# Altium PCB Mic.PcbDoc
Units mm, origin at the board's own origin, x right, y up, seen from the top; angles counter-clockwise.
Board outline 40.88 x 23.94 mm, 2 copper layers (Top Layer, Bottom Layer); 17 components, 12 nets, 38 pads, 52 vias.
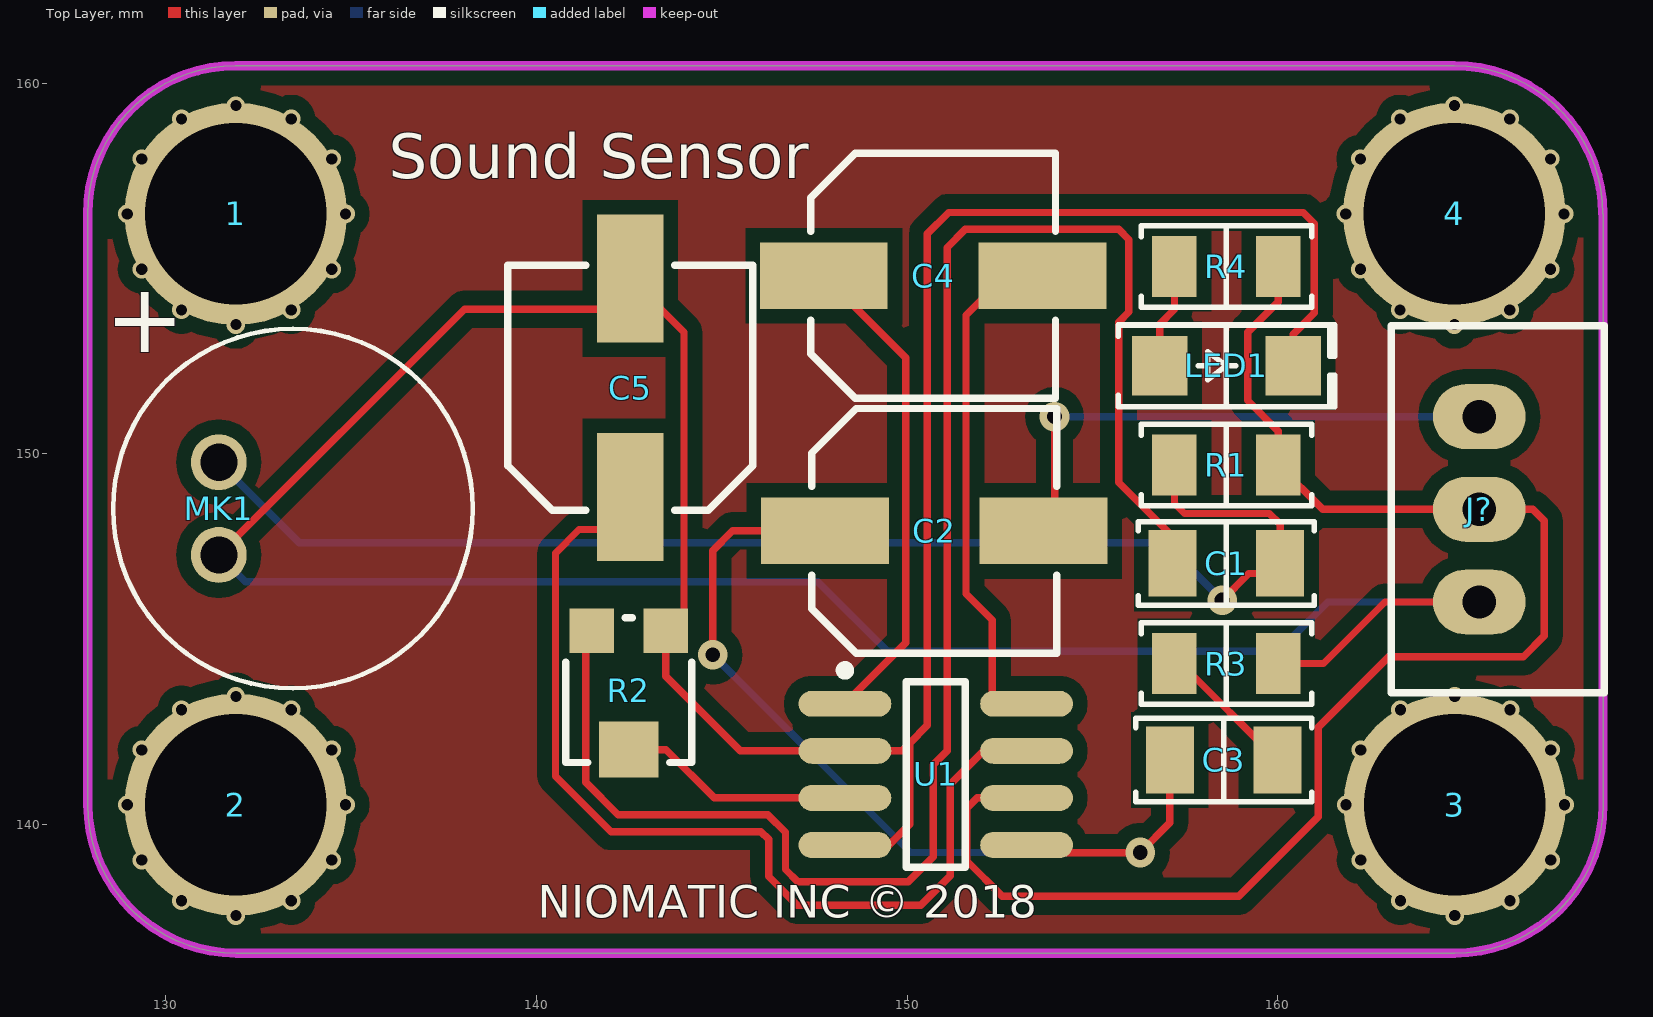
[diagram p0: Top Layer view]
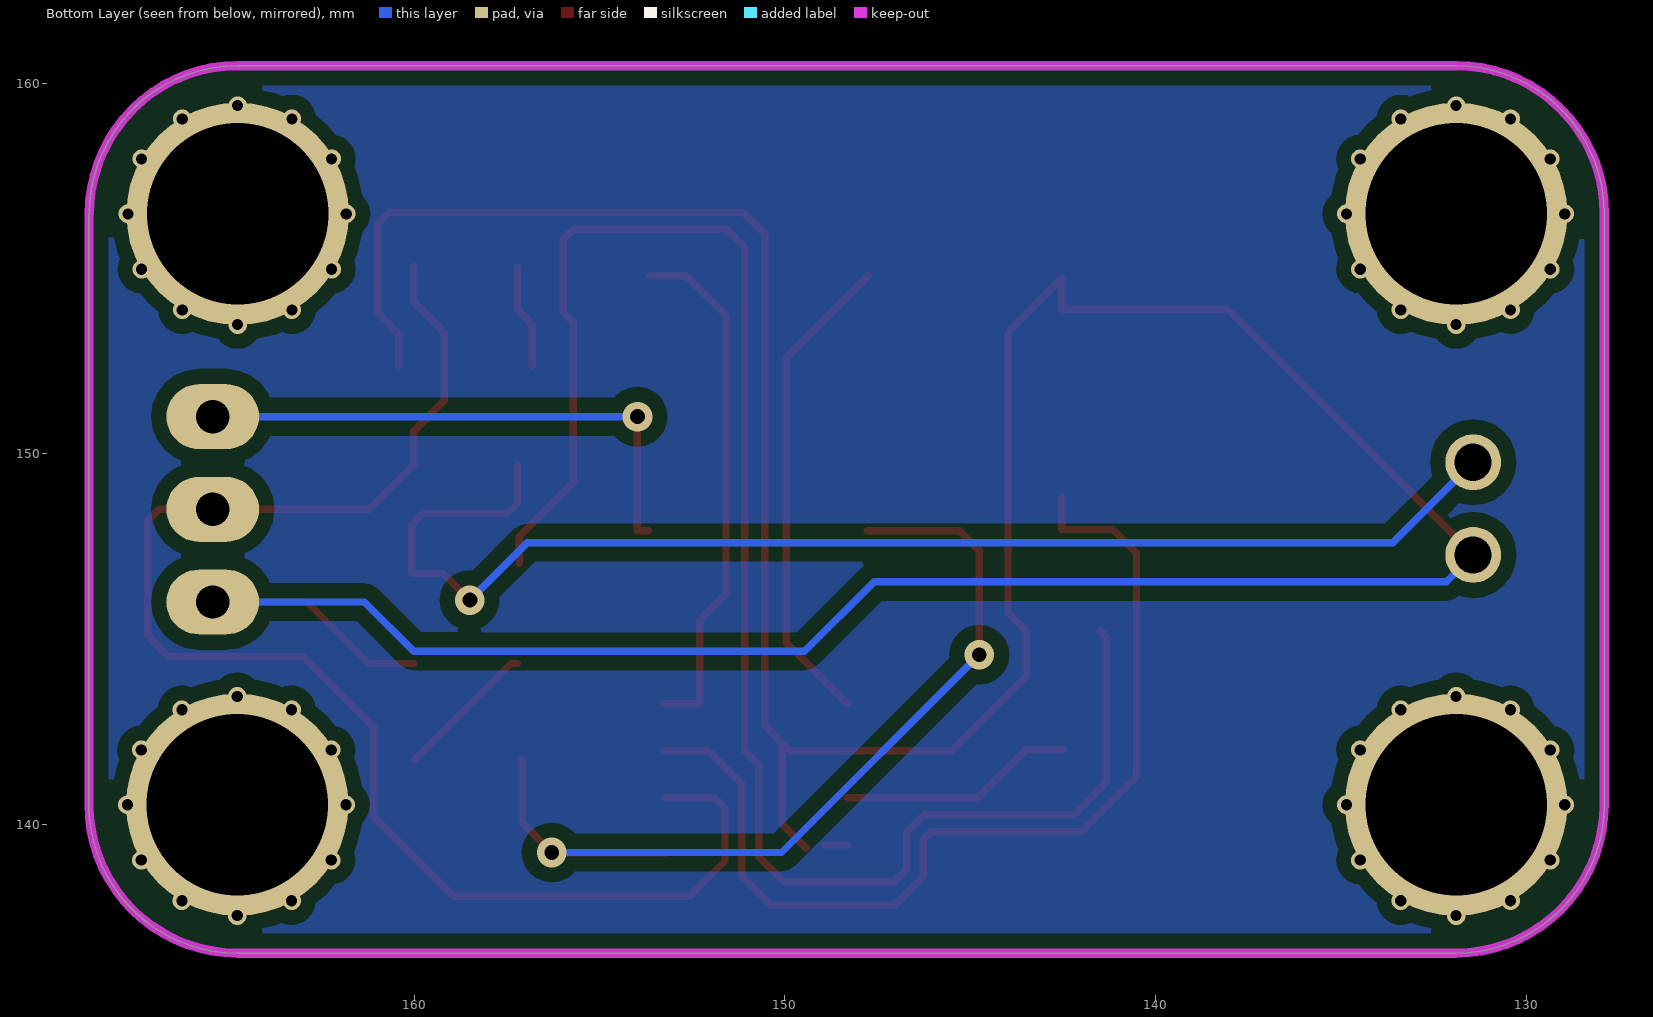
[diagram p1: Bottom Layer view, seen from below]
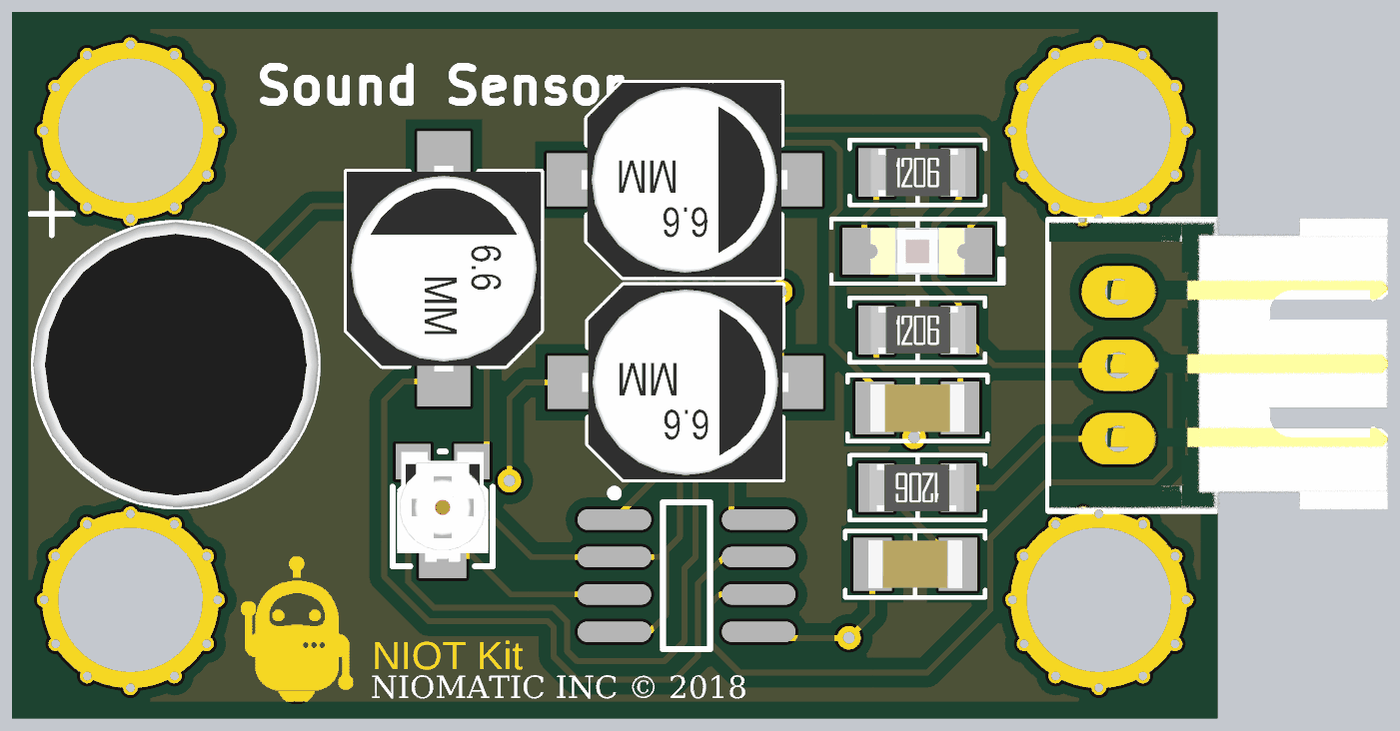
[diagram p2: 3D render of the assembled board from above, using the file's embedded part models]

## Layer stack, top to bottom
Top Solder: solder mask 0.0102, Solder Resist, Dk 3.5
Top Layer: signal copper 0.0356
Dielectric 1: dielectric 0.32, FR-4, Dk 4.8
Bottom Layer: signal copper 0.0356
Bottom Solder: solder mask 0.0102, Solder Resist, Dk 3.5

## Board outline
127.891,140.53 127.891,156.47 cw(c131.891,156.47) 131.891,160.47 164.761,160.47 cw(c164.761,156.47) 168.761,156.47 168.77,156.47 168.77,140.53 cw(c164.77,140.53) 164.77,136.53 131.9,136.53 cw(c131.9,140.53)

## Design rules (kind name [scope] priority, off if disabled: settings)
Clearance [All] p1: gap=0.4 ignorepadtopadclearanceinfootprint=FALSE
PolygonConnect [All] p1: connectstyle=Relief reliefconductorwidth=0.254 reliefentries=4 polygonreliefangle="90 Angle" airgapwidth=0.254
RoomDefinition Mic [InComponentClass('Mic')] p1: confinementstyle=ConfineIn formatcopy=TRUE lockcomponents=FALSE outline 178.943,26.924 198.247,26.924 198.247,44.577 178.943,44.577
RoutingVias [All] p1: holewidth=0.4 width=0.8 viastyle="Through Hole" minholewidth=0.4 minwidth=0.8 maxholewidth=0.4 maxwidth=0.8
SolderMaskExpansion [All] p1: expansion=0.102
Width [All] p1: maxlimit=0.2 minlimit=0.2 preferedwidth=0.2
30 further rules are at their usual default settings.

## Components (designator, comment, footprint, x,y, rotation, side; value= is the part's Value field where it differs from the comment)
1 "Lego" "Lego Hole" 131.89,156.47 r90 top
2 "Lego" "Lego Hole" 131.89,140.53 r90 top
3 "Lego" "Lego Hole" 164.771,140.53 r90 top
4 "Lego" "Lego Hole" 164.761,156.47 r90 top
C1 "100nF" "CAP 1206/3216" 158.61,147.042 r180 top value=0.1uF
C2 "10uF" "CAP ALUM 6.6MM" 150.73,147.92 r0 top
C3 "47nF" "CAP 1206/3216" 158.535,141.74 r180 top value=0.1uF
C4 "10uF" "CAP ALUM 6.6MM" 150.7,154.8 r0 top
C5 "10uF" "CAP ALUM 6.6MM" 142.53,151.78 r90 top
J? "Header" "JST XH B3B-XH-A - RIGHT" 165.433,148.5 r90 top
LED1 "RED" "LED 1206/3216 RED" 158.61,152.372 r0 top value=Green
MK1 "Mic" Mic 133.43,148.52 r90 top
R1 "1K" "RES 1206/3216" 158.61,149.695 r0 top
R2 "10k" "POT Panasonic EVM" 142.49,143.67 r180 top
R3 "10R" "RES 1206/3216" 158.61,144.34 r180 top value=1K
R4 "1K" "RES 1206/3216" 158.61,155.05 r0 top
U1 "LM386M-1" M08A_M 150.77,141.35 r0 top

## Footprints (in the part's own frame and the unit in brackets; to place one, negate y for a bottom-side part, rotate by r counter-clockwise, add the part's x,y. Pads: shape width x height; smd on the part's side, far side on the other; paste and mask are expansions set on the pad)
"CAP 1206/3216" [mm] "Chip Capacitor, 2-Leads, Body 3.25x1.60mm, IPC Medium Density"
  rect 1.3x1.8 smd: 1(-1.45,0) 2(1.45,0)
  silkscreen extent -2.37,-1.12 2.38,1.12, body extent -1.6,-0.81 1.6,0.81, height 1.62
"CAP ALUM 6.6MM" [mm] "Aluminum Electrolytic Capacitor, Body 6.60x6.60x7.70mm, IPC Low Density"
  rect 3.45x1.8 smd: 1(-2.95,0) 2(2.95,0)
  silkscreen extent -3.3,-3.3 3.3,3.3, body extent -3.5,-3.3 3.5,3.3, height 7.7
"JST XH B3B-XH-A - RIGHT" [mm]
  oval 1.75x2.5 hole 0.9: 1(-2.5,0) 2(0,0) 3(2.5,0)
  silkscreen extent -4.95,-3.38 4.95,2.38, body extent -4.9,-9.15 5,2.35, height 6.1
"LED 1206/3216 RED" [mm] "Chip Diode, 2-Leads, Body 3.13x1.55mm, IPC Medium Density"
  rect 1.5x1.6 smd: 1(-1.8,0) 2(1.8,0)
  silkscreen extent -2.92,-1.1 2.92,1.1, body extent -1.6,-0.8 1.6,0.8, height 0.9
"Lego Hole" [mm]
  round 6 hole 4.9: 0(0,0)
M08A_M [mm] "SOIC, 8-Leads, Body 4.9x3.9mm, Pitch 1.27mm, IPC Low Density"
  oval 2.5x0.7 smd: 1(-2.45,1.905) 2(-2.45,0.635) 3(-2.45,-0.635) 4(-2.45,-1.905) 5(2.45,-1.905) 6(2.45,-0.635) 7(2.45,0.635) 8(2.45,1.905)
  silkscreen extent -2.57,-2.5 0.8,2.93, body extent -2,-2.5 2,2.5, height 1.75
Mic [mm] "Electret Microphone"
  round 1.508 hole 1: NEG(-1.25,2) POS(1.25,2)
  silkscreen extent -4.85,-4.85 4.85,4.85, body extent -4.85,-4.85 4.85,4.85, height 5.15
"POT Panasonic EVM" [mm] "Panasonic EVM3Y 3.45mm x 3.10mm x 1.55mm"
  rect 1.2x1.2 smd: 1(-1,-1.55) 3(1,-1.55)
  rect 1.6x1.5 smd: 2(0,1.65)
  silkscreen extent -1.7,-1.9 1.7,2, body extent -1.55,-1.9 1.55,1.85, height 1.55
"RES 1206/3216" [mm] "Chip Resistor, 2-Leads, Body 3.13x1.55mm, IPC Medium Density"
  rect 1.2x1.65 smd: 1(-1.4,0) 2(1.4,0)
  silkscreen extent -2.3,-1.1 2.3,1.1, body extent -1.57,-0.8 1.62,0.8, height 0.6

## Part data
C1 C3: library part Capacitor, "SMT Capacitor"
C2 C4 C5: library part "Polarised Capacitor", "SMT Polarised Capacitor"
J?: library part "3 Pin"
LED1: library part LED, "Chip LED"
MK1: "MIC COND ANALOG OMNI -38DB", Package=None, Availability=Good, MF=PUI, MP=AOM-6738P-R, Price="1.06 USD"
R1 R3 R4: library part Resistor, "SMT Resistor"
R2: library part Potentiometer, "Potentiometer"
U1: "Low Voltage Audio Power Amplifier, 8-pin Narrow SOIC", Manufacturer="National Semiconductor", PackageTopMarking=NSZXTT*LM386*M-1, PowerWise=N, Code_IPC=SOIC127P600-8, Code_JEDEC=MS-012-AA, ComponentLink1Description="Manufacturer URL", ComponentLink1URL=http://www.national.com/, ComponentLink2Description="LM386 Datasheet", ComponentLink2URL=http://www.national.com/ds/LM/LM386.pdf, ComponentLink3Description="LM386 Web Page", ComponentLink3URL=http://www.national.com/pf/LM/LM386.html, ComponentLink4Description="M08A Package Page", ComponentLink4URL=http://www.national.com/packaging/folders/m08a.html, CompType="Audio IC", DatasheetVersion=Aug-2000, High-Reliability=Y, PackageDescription="SOIC Narrow, 4.9 x 3.9 x 1.45mm, 8 Lead, 1.27mm Pitch", PackageReference=M08A, PackageVersion="revM, May-2009", PartNumber=LM386M-1, PinCount=8, RoHS=N

## Via types
v1: diameter 0.5, hole 0.3, Top Layer to Bottom Layer, 48 vias
v2: diameter 0.8, hole 0.4, Top Layer to Bottom Layer, 4 vias

## Nets (pads, with @x,y where several pads share a name; then routed paths per layer and width w, separated by ;. In a path a pad name is that pad's centre, name@x,y a point inside that pad or via, vN(x,y) a via of type N, cw(c..) or ccw(c..) an arc to the next point about the centre after c; other vN are vias at no path point)
Data: C2.2 J?.3 | length 14.8
  Top Layer w0.2: C2.2 153.975,147.92 v2(153.975,151)
  Bottom Layer w0.2: v2(153.975,151) J?.3
GND: C5.2 J?.1 LED1.2 MK1.NEG R2.1 R3.1 U1.2 U1.4 | length 108
  Top Layer w0.2: MK1.NEG 138.059,153.899 142.53,153.899 C5.2 143.98,153.28 143.98,145.71 R2.1 143.49,143.992 145.497,141.985 U1.2 149.86,141.985 150.07,142.195 ; U1.4 U1.4@148.925,139.445 ; U1.4@149.42,139.36 150.07,140.01 150.07,142.195 ; R3.1 161.23,144.34 162.89,146 J?.1 ; LED1.2 160.41,153.222 160.985,153.797 160.985,156.21 160.687,156.508 151.117,156.508 150.546,155.937 150.546,142.671 150.07,142.195
  Bottom Layer w0.2: MK1.NEG 132.15,146.55 147.59,146.55 149.47,144.67 160.012,144.67 161.342,146 J?.1
NetC1_1: C1.1 MK1.POS R1.1 | length 35.9
  Top Layer w0.2: R1.1 157.21,148.657 157.48,148.387 159.766,148.387 160.06,148.093 C1.1 160.06,146.77 159.216,146.77 v2(158.496,146.05)
  Bottom Layer w0.2: MK1.POS 133.6,147.6 156.946,147.6 v2(158.496,146.05)
NetC1_2: C1.2 R2.3 | length 46.8
  Top Layer w0.2: R2.3 141.326,145.056 141.326,141.134 142.198,140.261 146.239,140.261 146.716,139.784 146.716,138.784 147.05,138.45 150.023,138.45 150.705,139.132 150.705,141.612 151.079,141.987 151.079,155.562 151.571,156.054 155.706,156.054 155.981,155.778 155.981,153.822 155.702,153.543 155.702,149.225 157.16,147.767 C1.2
NetC2_1: C2.1 C3.2 U1.5 | length 25.5
  Top Layer w0.2: v2(144.755,144.577) 144.755,147.387 145.288,147.92 C2.1 ; U1.5@153.17,139.235 v2@156.018,139.235 ; v2(156.286,139.243) 157.085,140.042 C3.2
  Bottom Layer w0.2: v2(144.755,144.577) 150.089,139.243 v2(156.286,139.243)
NetC3_1: C3.1 R3.2 | length 3.9
  Top Layer w0.2: R3.2 157.385,144.34 C3.1
NetC4_1: C4.1 U1.1 | length 13.1
  Top Layer w0.2: C4.1 149.962,152.588 149.962,144.897 U1.1
NetC4_2: C4.2 U1.8 | length 14.2
  Top Layer w0.2: U1.8 152.298,143.255 152.298,145.513 151.587,146.225 151.587,153.733 152.654,154.8 C4.2
NetC5_1: C5.1 U1.7 | length 27.1
  Top Layer w0.2: C5.1 142.53,147.955 141.148,147.955 140.513,147.32 140.513,141.304 142.01,139.807 146.051,139.807 146.262,139.596 146.262,138.596 147.038,137.82 150.368,137.82 151.159,138.611 151.159,141.083 152.06,141.985 U1.7
NetLED1_1: LED1.1 R4.1 | length 2.8
  Top Layer w0.2: LED1.1 156.81,153.492 157.21,153.892 R4.1
NetR2_2: R2.2 U1.3 | length 6.4
  Top Layer w0.2: R2.2 143.49,142.02 144.795,140.715 U1.3
VCC: J?.2 R1.2 R4.2 U1.6 | length 40.4
  Top Layer w0.2: U1.6 151.892,140.715 151.613,140.436 151.613,139.014 152.567,138.06 158.939,138.06 161.087,140.208 161.087,142.621 162.992,144.526 166.624,144.526 167.183,145.085 167.183,148.195 166.878,148.5 J?.2 161.205,148.5 R1.2 160.01,150.607 159.182,151.435 159.182,153.274 160.01,154.102 R4.2
pads on no net: 1.0 2.0 3.0 4.0
copper on no net:
  other v1: 131.89,137.541 164.771,137.541 130.424,137.941 133.384,137.941 163.305,137.941 166.266,137.941 129.352,139.036 134.479,139.036 162.233,139.036 167.36,139.036 128.96,140.53 134.85,140.53 161.841,140.53 167.731,140.53 129.352,142.011 134.479,142.011 162.233,142.011 167.36,142.011 130.424,143.094 133.384,143.094 163.305,143.094 166.266,143.094 131.89,143.451 164.771,143.451 131.89,153.481 164.761,153.481 130.424,153.881 133.384,153.881 163.295,153.881 166.255,153.881 129.352,154.976 134.479,154.976 162.223,154.976 167.35,154.976 128.96,156.47 134.85,156.47 161.831,156.47 167.721,156.47 129.352,157.951 134.479,157.951 162.223,157.951 167.35,157.951 130.424,159.034 133.384,159.034 163.295,159.034 166.255,159.034 131.89,159.391 164.761,159.391

## Polygon pours and split planes (outlines as drawn)
no net on Top Layer "Top Layer-No Net" (solid, pour order 0): 127.891,140.53 127.891,156.47 cw(c131.891,156.47) 131.891,160.47 164.761,160.47 cw(c164.761,156.47) 168.761,156.47 168.77,156.47 168.77,140.53 cw(c164.77,140.53) 164.77,136.53 131.9,136.53 cw(c131.895,140.535)
no net on Bottom Layer "Top Layer-No Net1" (solid, pour order 1): 127.891,140.53 127.891,156.47 cw(c131.891,156.47) 131.891,160.47 164.761,160.47 cw(c164.761,156.47) 168.761,156.47 168.77,156.47 168.77,140.53 cw(c164.77,140.53) 164.77,136.53 131.9,136.53 cw(c131.895,140.535)

## Keep-outs
Keep-Out Layer:
  lines w0.254: 127.891,140.53 127.891,156.47 cw(c131.891,156.47) 131.891,160.47 164.761,160.47 cw(c164.761,156.47) 168.761,156.47 ; 127.9,140.53 ccw(c131.9,140.53) 131.9,136.53 164.77,136.53 ccw(c164.77,140.53) 168.77,140.53 168.77,156.47

## Silkscreen, mask and mechanical layers (free items; w line width, h text height)
Top Overlay:
  text "Sound Sensor" at 136.02,157.43 h1.2
  text "NIOMATIC INC © 2018" at 140.04,137.19 h1.5
Top Solder:
  drawing of 381 lines, arcs and shapes, not listed
  text "NIOT Kit" at 140.09,138.17 h1.52

## Text inside footprints (layer, text, board x,y; h text height)
MK1: Top Overlay "+" at 130.509,154.362 h1.88 r180